# Altium PCB PCB.PcbDoc (part 3 of 4)
Units mm, origin at the board's own origin, x right, y up, seen from the top; angles counter-clockwise.
Board outline 86.25 x 140 mm, 4 copper layers (Top Layer, GND, PWR, Bottom Layer), stack 1.57 mm thick; 308 components, 255 nets, 1064 pads, 1223 vias.
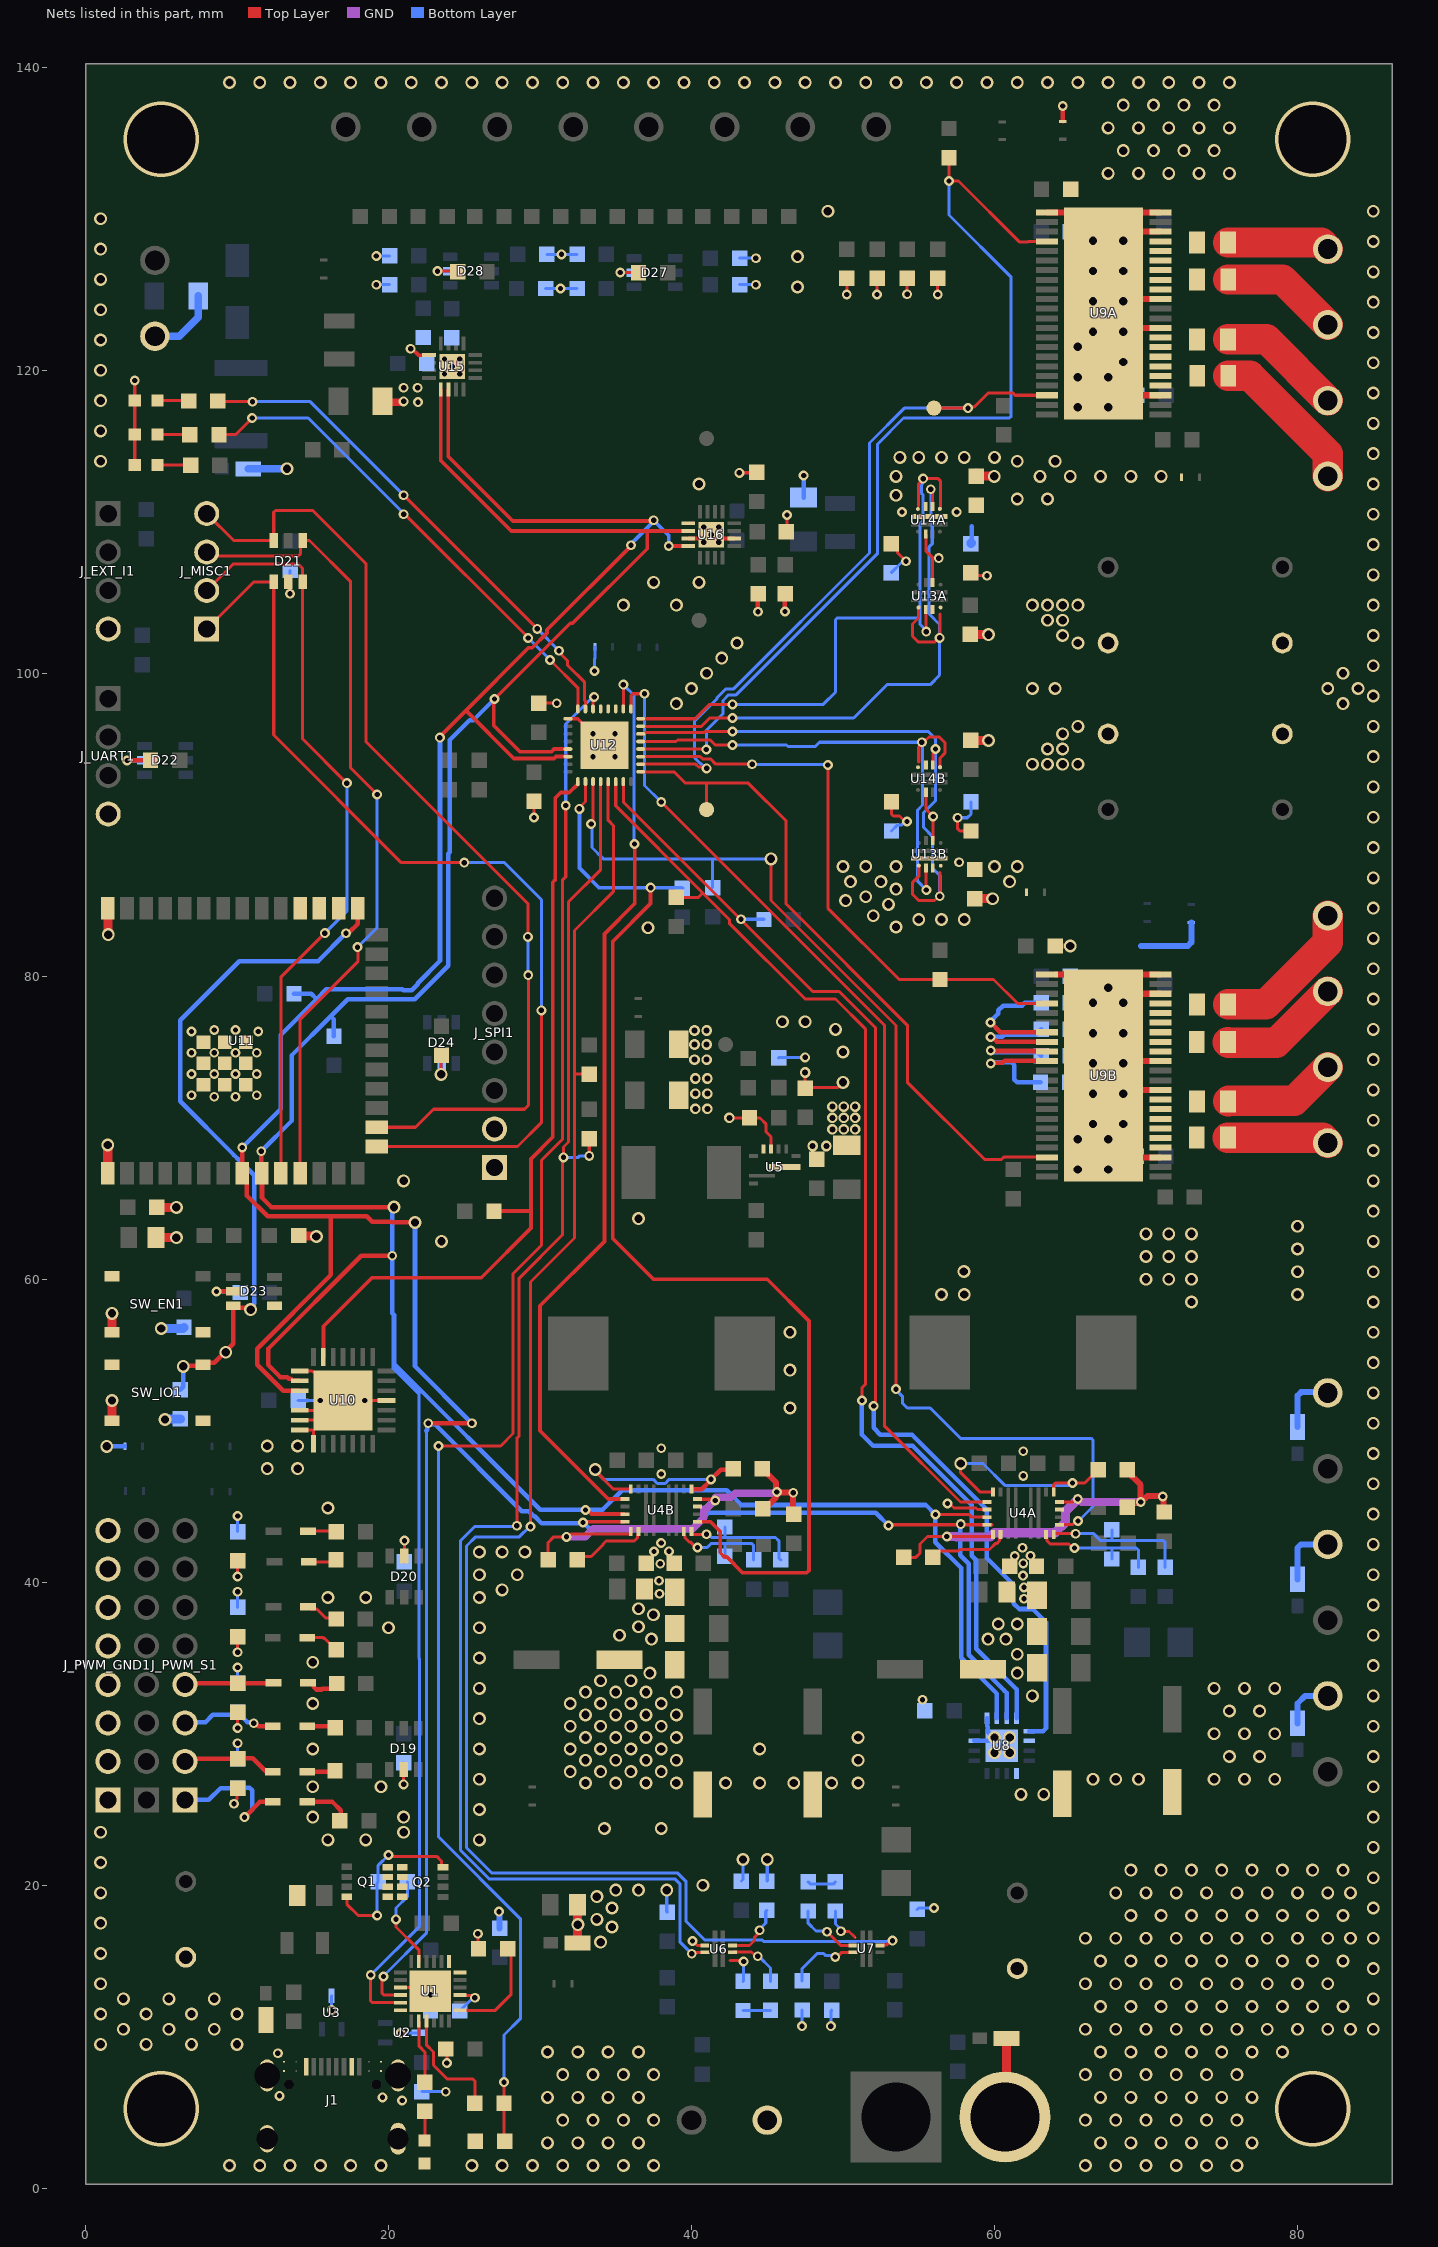
[diagram p5: the nets of this part, all layers, seen from the top]

## Via types
v1: diameter 0.85, hole 0.55, Top Layer to Bottom Layer, tented both sides, 772 vias
v2: diameter 0.65, hole 0.35, Top Layer to Bottom Layer, tented both sides, 362 vias
v3: diameter 0.65, hole 0.35, Top Layer to Bottom Layer, tented bottom, 26 vias
v4: diameter 0.7, hole 0.4, Top Layer to Bottom Layer, tented both sides, 25 vias
v5: diameter 0.65, hole 0.35, Top Layer to Bottom Layer, tented top, 19 vias
v6: diameter 0.85, hole 0.55, Top Layer to Bottom Layer, tented bottom, 14 vias
v7: diameter 5, hole 4.5, Top Layer to Bottom Layer, 4 vias
v8: diameter 0.8, hole 0.5, Top Layer to Bottom Layer, tented both sides, 1 vias

## Nets (pads, with @x,y where several pads share a name; then routed paths per layer and width w, separated by ;. In a path a pad name is that pad's centre, name@x,y a point inside that pad or via, vN(x,y) a via of type N, cw(c..) or ccw(c..) an arc to the next point about the centre after c; other vN are vias at no path point) (continued)
GND: C1.2 C2.1 C3.1 C4.1 C5.1 C8A.2 C8B.2 C9A.1 C9B.1 C10A.1 C10B.1 C12A.1 C12B.1 C13A.1 C13B.1 C14A.1 C14B.1 C15A.1 C15B.1 C16A.2 C16B.2 C17A.2 C17B.2 C18A.1 C18B.1 C21.1 C22.1 C23.1 C24.1 C25.2 C26.1 C27.1 C28.1 C29.1 C30.1 C31.1 C32A.2 C32B.2 C34A.2 C34B.2 C35A.1 C35B.1 C36A.2 C36B.2 C38A.1 C38B.1 C39.1 C40.1 C41.1 C42.2 C43.1 C44.1 C45.1 C46.1 C47.1 C48.1 C49.1 C50.1 C51.1 C52.1 C53.1 C54A.1 C54B.1 C55A.1 C55B.1 C56A.2 C56B.2 C57A.1 C57B.1 C58A.1 C58B.1 C59.1 C60.1 C61.1 C62.1 C63.1 C64.1 C65.1 C66.1 C67.1 C68.1 C69.1 C*1A.1 C*1B.1 C*2A.1 C*2B.1 C*3.1 D1.A D2.A D3.K D4.K D6.A D7.A D8.A D9.A D10.A D19.2 D20.2 D21.2 D22.2 D23.2 D24.2 D25.K D26.K D27.2 D28.2 J1.17 J1.18 J1.19 J1.20 J1.A1 J1.A12 J1.B1 J1.B12 J_1.2 J_EXT_1.2 J_EXT_2.2 J_EXT_I1.4 J_PWM_GND1.1 J_PWM_GND1.2 J_PWM_GND1.3 J_PWM_GND1.4 J_PWM_GND1.5 J_PWM_GND1.6 J_PWM_GND1.7 J_PWM_GND1.8 J_SPI1.1 J_SPI1.2 J_SUP1.2 J_UART1.4 J_VREG1.2 J_VREG2.2 JP2A.1 JP2B.1 JP4.2 PWM_3.1 R3.1 R6.1 R11.1 R13.1 R15.1 R18.1 R21.1 R23.1 R24A.1 R24B.1 R25A.1 R25B.1 R26A.1 R26B.1 R27A.1 R27B.1 R38.1 R39.1 R40.1 R41.1 R42.1 R43.1 R44.1 R45.1 R55A.2 R55B.2 R56A.2 R56B.2 R62.2 R63.2 R64.2 R65.2 R66.2 R67.2 R68.2 R69.2 R*2A.1 R*2B.1 R_CC2.1 RCC1.1 SW_EN1.2 SW_IO1.2 U1.3 U1.25 U2.3 U3.3 U4A.2 U4A.5 U4A.9 U4A.17 U4B.5 U4B.9 U4B.17 U5.3 U5.9 U6.2 U6.8 U7.8 U8.3 U8.5 U8.17 U9A.3 U9A.10 U9A.13 U9A.20 U9A.22 U9A.23 U9A.45 U9B.3 U9B.10 U9B.13 U9B.20 U9B.22 U9B.23 U9B.45 U10.1 U10.11 U10.22 U10.26 U10.27 U10.28 U10.29 U11.1 U11.40 U11.41_1 U11.41_2 U11.41_3 U11.41_4 U11.41_5 U11.41_6 U11.41_7 U11.41_8 U11.41_9 U12.25 U12.33 U13A.8 U13B.8 U14A.8 U14B.8 U15.9 U15.17 U16.7 U16.14 U16.17 | length 324
  Top Layer w0.2: D4.K@3.25,113.75 D25.K@3.25,115.75 D26.K@3.25,118 v2(3.25,119.322) ; v2(9.8,25.385) 9.8,25.506 10,25.706 10,26.378 R44.1@10.04,26.418 ; v2(10.04,30.38) R42.1@10.04,31.418 ; v2(10.04,35.38) R40.1@10.04,36.418 ; v2(10.04,40.38) R38.1@10.04,41.418 ; D21.2@13.375,106.038 13.437,105.975 13.437,105.313 v2(13.5,105.25) ; U10.28@14.133,50.05 15.031,50.05 15.05,50.031 U10.1@15.05,49.133 ; U10.27@14.133,50.7 15.7,50.7 16.35,51.35 U10.26@14.133,51.35 ; U10.22@14.133,53.95 14.95,53.95 15.025,53.875 15.144,53.875 17,52.019 U10.29@17,52 v2(18.433,52) U10.11@19.867,52 ; U1.3@20.785,13.25 22.5,13.25 U1.25@22.75,13 ; v2(21,26.663) D19.2@21,27.638 ; D20.2@21.04,41.742 21.046,41.748 21.046,42.745 v2(21.052,42.751) ; v5(23.238,126.546) 24.529,126.546 C64.1@24.575,126.5 ; v1(23.475,73.525) 23.475,74.766 C50.1@23.496,74.788 ; v5(23.7,120.75) v5(24.2,120.25) ; C4.1@23.782,9.196 23.851,9.127 v2(23.851,8.269) ; v2(25.9,16.8) 25.9,15.838 R3.1@25.938,15.8 ; v2(29.6,90.475) C53.1@29.6,91.55 ; C52.1@29.926,98.024 v2(31.101,98.024) ; R*2B.1@30.538,41.5 30.538,42.633 30.905,43 v2(31.75,43) 31.872,43 32.072,43.2 35.98,43.2 36,43.22 U4B.5@36,43.35 ; U12.25@31.85,97 32.5,97 v2(33.5,96) U12.33@34.25,95.25 ; v5(35.3,126.45) C63.1@36.5,126.45 ; v2(40.06,16.325) 40.085,16.325 40.385,16.025 U6.2@40.9,16.025 ; U4B.17@40.4,45.5 40.42,45.48 41.485,45.48 v2(41.565,45.4) ; v4(42.5,70.65) R11.1@43.825,70.65 43.827,70.648 44.516,70.648 44.932,70.232 44.932,69.718 44.964,69.686 45.25,69.4 U5.3@45.25,68.6 ; U6.8@42.7,15.575 42.725,15.6 43.964,15.6 44.252,15.312 v2(44.374,15.312) ; C68.1@44.371,105.212 C68.1@44.396,105.238 ; C69.1@46.19,105.231 C69.1@46.196,105.238 ; C66.1@46.262,109.346 46.3,109.384 v2(46.3,110.45) ; R13.1@47.5,72.612 R13.1@47.5,72.9 ; v4(47.5,73.65) R13.1@47.5,72.9 ; v2(48.942,16.934) 49.85,16.025 U7.8@50.65,16.025 ; v1(50,73) 49.65,72.65 47.75,72.65 R13.1@47.5,72.9 ; v2(50.25,125) R24A.1@50.25,126.075 ; v2(52.25,125) R25A.1@52.25,126.075 ; R55A.2@53.19,108.562 53.598,108.154 53.598,107.957 v2(54.16,107.396) ; R55B.2@53.2,91.512 53.2,90.704 53.323,90.582 53.729,90.582 54.098,90.213 v2(54.22,90.213) ; R*2A.1@54,41.65 54.808,41.65 55.077,41.919 55.077,42.527 55.573,43.023 56.852,43.023 v2(56.853,43.024) ; v2(54.234,125.016) 54.234,126.059 R26A.1@54.25,126.075 ; U14A.8@55.465,109.2 55.465,108.075 55.915,107.625 ; U14B.8@55.475,92.15 55.475,91.025 55.925,90.575 U13B.8@55.925,88.95 ; U13A.8@55.915,106 55.915,107.575 55.94,107.6 v2(56.315,107.6) ; v2(56.25,125) R27A.1@56.25,126.075 ; v2@56.855,43.024 59.88,43.024 59.9,43.044 U4A.5@59.9,43.15 ; v2(56.9,45.198) 57.022,45.198 57.32,44.9 58.773,44.9 58.873,44.8 U4A.2@59.5,44.8 ; v2(57.568,90.464) 57.568,89.732 57.712,89.588 R56B.2@58.45,89.588 ; R56A.2@58.44,106.638 58.637,106.441 v2(59.502,106.441) ; U4A.17@64.3,45.3 65.178,45.3 65.378,45.5 v2(65.5,45.5) ; C38A.1@65.025,131.95 C38A.1@65.075,132
  Top Layer w0.25: v2(21.462,121.423) 21.56,121.423 21.982,121 U15.9@22.679,121 ; U16.7@39.779,108.9 40.56,108.9 40.8,108.66 v2(40.8,108.65) ; U16.17@41.8,108.66 42.04,108.9 U16.14@42.821,108.9 ; v2(43.159,113.23) 44.272,113.23 C67.1@44.304,113.262
  Top Layer w0.3: v2(2.75,94.25) 2.754,94.254 C48.1@4.288,94.254 ; v2(8.65,59.2) D23.2@9.75,59.2 ; C68.1@44.371,105.212 44.387,105.195 v2(44.387,104.062) ; v2(46.166,104.074) 46.166,105.207 C69.1@46.19,105.231 ; U9B.23@63.45,80.118 63.95,80.118 U9B.23@64,80.168 ; C38B.1@64,82 v1(65,82) ; JP2A.1@64.5,136.425 v2(64.5,137.45)
  Top Layer w0.4: C18B.1@44.675,47.5 45.587,46.587 45.587,46.005 v2(45.635,45.957) ; C*1B.1@44.693,44.865 44.762,44.796 45.587,45.621 45.587,45.909 v2(45.635,45.957) ; C*2B.1@46.75,44.5 46.713,44.537 v2(46.713,45.912) 46.691,45.934 45.658,45.934 v2(45.635,45.957) ; U9A.23@63.45,130.418 64.8,130.418 U9A.45@67.2,128.018 ; U9B.23@63.95,80.118 64.775,80.118 U9B.45@66.5,78.393 ; U9B.45@66.084,75.834 U9B.45@67.084,74.834 ; U9B.45@67.2,73.25 67.2,70.25 67.375,70.075 67.375,69.375 v1(67.5,69.25) ; U9A.45@67.2,121.55 67.2,120.753 69.6,118.353 U9A.3@70.95,118.353 ; U9A.45@67.2,123.75 U9A.45@67.2,126.748 ; U9B.45@67.385,74.135 67.385,75.135 67.5,75.25 U9B.45@68.5,75.25 ; U9B.45@67.385,75.403 U9B.45@67.385,78.403 ; U9B.45@67.5,78.25 69.368,80.118 U9B.22@70.95,80.118 ; U9B.45@68.5,71.25 U9B.45@68.4,71.35 ; U9A.45@68.5,122.798 U9A.10@70.95,122.798 ; U9A.45@68.5,124.703 U9A.13@70.95,124.703 ; C*1A.1@68.762,44.946 69.068,45.252 69.602,45.252 v2(69.65,45.3) ; C18A.1@68.762,47.435 68.701,47.374 69.65,46.425 v2(69.65,45.3) ; U9B.3@70.95,68.053 69.6,68.053 68.4,69.253 U9B.45@68.4,71.35 ; U9B.10@70.95,72.498 69.6,72.498 69.6,74.403 U9B.13@70.95,74.403 ; U9B.20@70.95,78.848 69.098,78.848 v1(68.5,78.25) v1(68.5,76.25) U9B.45@68.5,75.25 ; U9A.20@70.95,129.148 69.6,129.148 U9A.45@67.2,126.748 ; U9A.22@70.95,130.418 69.6,130.418 U9A.45@67.2,128.018 ; C*2A.1@71.204,44.637 71.157,44.684 71.157,45.612 v2(71.11,45.659) 71.081,45.688 70.086,45.688 69.698,45.3 v2(69.65,45.3) ; U9A.45@67.2,126.748 U9A.45@67.2,128.018 ; U9B.45@67.5,73.15 U9B.45@68.4,72.25 ; U9B.45@67.5,73.15 67.5,72.25 U9B.45@68.4,72.25 ; U9B.45@67.5,73.15 U9B.45@67.2,73.45 67.2,73.95 67.625,74.375 67.75,74.375 68.5,75.125 U9B.45@68.5,75.25 ; U9B.45@68.4,71.35 U9B.45@68.4,72.25
  Top Layer w0.5: C59.1@19.6,117.95 19.645,117.905 20.955,117.905 v2(21,117.95)
  Top Layer w0.6: U11.1@1.465,67 v1(1.465,68.862) ; U11.40@1.465,84.5 1.483,84.483 1.483,82.768 v1(1.5,82.75) ; SW_IO1.2@1.75,50.65 v1(1.75,52) ; SW_EN1.2@1.75,56.5 v1(1.75,57.75) ; C45.1@4.65,62.75 v1(6,62.75) ; C46.1@4.712,64.746 v1(5.996,64.746) ; C47.1@14.063,62.89 14.094,62.858 15.207,62.858 v1(15.239,62.827) ; D1.A@32.469,16.205 32.475,16.212 C2.1@32.475,18.718 ; C54A.1@58.411,102.571 58.421,102.56 59.59,102.56 v1(59.6,102.55) ; C57B.1@58.425,95.575 v1@59.594,95.575 ; C54B.1@58.7,85.125 v1@59.869,85.125 ; C57A.1@58.804,113.212 59.004,113.012 v1@59.972,113.012 ; J_EXT_1.2@60.7,4.7 60.797,4.797 D7.A@60.797,9.9
  GND w0.5: v2(31.75,43) 32.993,43 33.514,43.521 40.071,43.521 40.804,44.254 40.804,44.813 40.937,44.813 41.524,45.4 v2(41.565,45.4) ; v2@41.565,45.574 41.593,45.602 42.607,45.602 42.89,45.884 45.457,45.884 45.5,45.928 45.607,45.928 v2(45.635,45.957) ; v2(65.5,45.5) 65.541,45.5 65.741,45.3 v2(69.65,45.3)
  GND w0.6: v2@56.876,43.015 57.472,43.015 57.489,42.998 59.718,42.998 59.987,43.267 63.987,43.267 64.689,43.968 64.689,44.675 65.5,45.486 v2(65.5,45.5)
  Bottom Layer w0.2: R45.1@10.04,28.342 v2(10.04,29.38) ; R43.1@10.04,33.342 v2(10.04,34.38) ; R41.1@10.04,38.342 v2(10.04,39.38) ; R39.1@10.04,43.342 v2(10.04,44.38) ; v2(13.5,105.25) 13.5,106.784 C44.1@13.504,106.788 ; C39.1@14.03,52.004 14.034,52 v2(15.5,52) ; U3.3@16.25,12.7 16.252,12.698 16.252,11.76 v2(16.254,11.758) ; v5(19.2,125.65) R65.2@20.075,125.65 ; v5(19.2,127.55) R64.2@20.075,127.55 ; v2(20.8,10.24) 20.813,10.253 21.983,10.253 U2.3@21.995,10.265 ; v2(21,26.663) C40.1@21,28.075 ; C41.1@21.036,41.342 21.052,41.358 v2(21.052,42.751) ; R_CC2.1@22.2,6.375 v2(23.775,6.375) ; C5.1@22.775,11.7 22.769,11.707 v2(22.769,12.768) 22.769,13.744 C3.1@22.8,13.775 ; v5(23.238,126.546) v5(23.238,126.546) 24.073,126.548 D28.2@24.075,126.55 ; v1(23.475,73.525) 23.488,73.538 23.488,74.238 D24.2@23.5,74.25 ; R62.2@30.375,125.4 v5(31.35,125.4) R69.2@32.45,125.4 ; R63.2@30.45,127.65 v5(31.425,127.65) R68.2@32.45,127.65 ; v2(33.6,100.15) 33.6,100.966 33.625,100.991 JP4.2@33.625,101.75 ; v5(35.3,126.45) D27.2@36.2,126.45 ; v1(38.366,19.677) 38.366,18.258 R15.1@38.4,18.225 ; R66.2@43.175,125.65 v5(44.25,125.65) ; R67.2@43.175,127.4 v5(44.25,127.4) ; C26.1@43.294,20.278 43.4,20.384 v1(43.4,21.7) ; v2(44.374,15.312) 44.447,15.312 45.215,14.544 C27.1@45.215,13.664 ; R18.1@44.973,20.274 45,20.3 v1(45,21.7) ; C*3.1@45.746,74.612 45.784,74.65 v2(47.5,74.65) ; v2(47.3,10.7) R23.1@47.3,11.765 ; C29.1@47.7,18.3 47.7,17.492 48.217,16.975 48.9,16.975 v2(48.942,16.934) ; v2(49.2,10.7) 49.2,11.7 C28.1@49.25,11.75 ; C58A.1@53.194,106.638 53.866,107.31 54.073,107.31 v2(54.16,107.396) ; C58B.1@53.204,89.588 53.612,89.996 53.881,89.996 54.098,90.213 v2(54.22,90.213) ; R21.1@54.899,18.408 54.991,18.5 v2(56,18.5) ; v2(57.568,90.464) 58.21,90.464 58.45,90.704 C55B.1@58.45,91.512
  Bottom Layer w0.3: v1(1.4,48.975) PWM_3.1@2.6,48.975 ; v2(2.75,94.25) D22.2@3.888,94.25 ; v2(8.65,59.2) 10.15,59.2 C49.1@10.22,59.129 ; C65.1@47.4,111.6 v2(47.4,113.05) ; C55A.1@58.465,108.588 58.5,108.622 58.5,109.7 ; U8.3@58.654,29.529 U8.17@60.154,29.529 ; U8.5@59.504,31.029 59.507,31.027 59.507,30.502 59.549,30.459 59.549,30.134 U8.17@60.154,29.529 ; v1(61,29.75) 60.479,29.229 U8.17@60.479,29.204 U8.17@60.154,29.529
  Bottom Layer w0.4: RCC1.1@27.335,17.162 v2@27.335,18.26 ; 69.662,82 72.766,82 73,82.234 JP2B.1@73,83.55 ; D9.A@80,30.697 80,32 80.5,32.5 J_SUP1.2@82,32.5 ; D10.A@80,40.197 80,42.266 80.234,42.5 J_VREG2.2@82,42.5 ; D8.A@80,50.25 80,52.319 80.234,52.553 J_VREG1.2@82,52.553
  Bottom Layer w0.5: J_1.2@4,122.25 J_1.2@4.581,122.25 6.2,122.25 7.439,123.489 C30.1@7.439,124.906 ; D6.A@10.75,113.5 v1(13.303,113.5)
  Bottom Layer w0.6: v1(5,56.75) 6.425,56.75 C51.1@6.5,56.825 ; v1(5.25,50.75) 5.269,50.769 6.235,50.769 C43.1@6.254,50.788 ; C55A.1@58.44,108.562 C55A.1@58.465,108.588
  other v1: 9.5,1.5 11.5,1.5 13.5,1.5 15.5,1.5 17.5,1.5 19.5,1.5 25.5,1.5 27.5,1.5 29.5,1.5 31.5,1.5 33.5,1.5 35.5,1.5 37.5,1.5 66,1.5 68,1.5 70,1.5 72,1.5 74,1.5 76,1.5 30.5,3 32.5,3 34.5,3 36.5,3 67,3 69,3 71,3 73,3 75,3 77,3 31.5,4.5 33.5,4.5 35.5,4.5 37.5,4.5 66,4.5 68,4.5 70,4.5 72,4.5 74,4.5 76,4.5 30.5,6 32.5,6 34.5,6 36.5,6 67,6 69,6 71,6 73,6 75,6 77,6 31.5,7.5 33.5,7.5 35.5,7.5 37.5,7.5 66,7.5 68,7.5 70,7.5 72,7.5 74,7.5 76,7.5 30.5,9 32.5,9 34.5,9 36.5,9 67,9 69,9 71,9 73,9 75,9 77,9 79,9 1,9.5 4,9.5 7,9.5 10,9.5 2.5,10.5 5.5,10.5 8.5,10.5 66,10.5 68,10.5 70,10.5 72,10.5 74,10.5 76,10.5 78,10.5 80,10.5 82,10.5 83.5,10.5 85,10.5 1,11.5 4,11.5 7,11.5 10,11.5 67,12 69,12 71,12 73,12 75,12 77,12 79,12 81,12 83,12 2.5,12.5 5.5,12.5 8.5,12.5 85,12.5 1,13.5 66,13.5 68,13.5 70,13.5 72,13.5 74,13.5 76,13.5 78,13.5 80,13.5 82,13.5 85,14.5 67,15 69,15 71,15 73,15 75,15 77,15 79,15 81,15 83,15 1,15.5 34,16.25 66,16.5 68,16.5 70,16.5 72,16.5 74,16.5 76,16.5 78,16.5 80,16.5 82,16.5 83.5,16.5 85,16.5 34.75,17.25 32.5,17.4 1,17.5 33.75,17.75 69,18 71,18 73,18 75,18 77,18 79,18 81,18 83,18 34.75,18.5 85,18.5 33.75,19.25 1,19.5 68,19.5 70,19.5 72,19.5 74,19.5 76,19.5 78,19.5 80,19.5 82,19.5 83.5,19.5 35,19.677 36.5,19.677 40.75,20 85,20.5 69,21 71,21 73,21 75,21 77,21 79,21 81,21 83,21 1,21.5 85,22.5 16,23 18.5,23 26,23 1,23.5 21,23.5 34.25,23.75 38,23.75 15,24.5 21,24.5 85,24.5 26,25 61.75,26 63.25,26 15,26.5 19.5,26.5 85,26.5 33,26.75 35,26.75 37,26.75 39,26.75 42.25,26.75 44.5,26.75 46.75,26.75 49.25,26.75 51,26.75 26,27 66.5,27 68,27 69.5,27 74.5,27 76.5,27 78.5,27 32,27.5 34,27.5 36,27.5 38,27.5 33,28.25 35,28.25 37,28.25 39,28.25 51,28.25 75.5,28.5 77.5,28.5 85,28.5 60,28.75 61,28.75 15,29 26,29 32,29 34,29 36,29 38,29 44.5,29 33,29.75 35,29.75 37,29.75 39,29.75 51,29.75 60,29.75 74.5,30 76.5,30 78.5,30 32,30.5 34,30.5 36,30.5 38,30.5 85,30.5 26,31 33,31.25 35,31.25 37,31.25 39,31.25 75.5,31.5 77.5,31.5 15,32 32,32 34,32 36,32 38,32 62.5,32.5 85,32.5 33,32.75 35,32.75 37,32.75 39,32.75 26,33 74.5,33 76.5,33 78.5,33 34,33.5 36,33.5 37.25,34 61.5,34 85,34.5 14.998,34.719 26,35 61.5,35.25 37.354,36.247 59.575,36.25 60.75,36.25 35.25,36.5 85,36.5 20,37 26,37 36.499,37.068 60.25,37.25 61.5,37.25 37.48,37.854 36.5,38.25 85,38.5 16,39 18.5,39 26,39 27.5,39.5 26,40.5 28.5,40.5 85,40.5 26,42 27.5,42 29,42 85,42.5 85,44.5 16,44.9 85,46.5 12,47.5 14,47.5 85,48.5 12,49 14,49 85,50.5 46.5,51.5 85,52.5 46.5,54 85,54.5 46.5,56.5 85,56.5 73,58.5 85,58.5 56.5,59 58,59 80,59 70,60 71.5,60 73,60 80,60.5 85,60.5 57.975,60.516 70,61.5 71.5,61.5 73,61.5 80,62 23.5,62.5 85,62.5 70,63 71.5,63 73,63 80,63.5 36.5,64 85,64.5 21,66.5 85,66.5 65.5,67.25 67.5,67.25 85,68.5 65.5,69.25 66.5,70.25 68.5,70.25 85,70.5 66.5,72.25 68.5,72.25 85,72.5 66.5,74.25 68.5,74.25 85,74.5 50,75 66.5,76.25 49.5,76.5 85,76.5 46,77 47.5,77 66.5,78.25 85,78.5 67.5,79.25 85,80.5 85,82.5 37.125,83.2 85,84.5 59.879,85.115 85,86.5 85,88.5 85,90.5 85,92.5 62.5,94 63.5,94 64.5,94 65.5,94 85,94.5 63.5,95 64.5,95 59.604,95.565 64.5,96 65.5,96.5 85,96.5 39,98 83,98 85,98.5 40,99 62.5,99 64,99 82,99 84,99 41,100 83,100 85,100.5 42,101 43,102 65.5,102 64.5,102.5 85,102.5 63.5,103.5 64.5,103.5 35.5,104.5 39,104.5 62.5,104.5 63.5,104.5 64.5,104.5 65.5,104.5 85,104.5 37.5,106 40.5,106 85,106.5 85,108.5 85,110.5 40.5,112.5 85,112.5 59.983,113.002 1,114 85,114.5 1,116 85,116.5 65.5,117.55 67.5,117.55 1,118 85,118.5 65.5,119.55 67.5,119.55 1,120 85,120.5 68.5,120.55 65.5,121.55 1,122 85,122.5 66.5,122.55 68.5,122.55 1,124 85,124.5 66.5,124.55 68.5,124.55 47,125.5 1,126 85,126.5 66.5,126.55 68.5,126.55 47,127.5 1,128 85,128.5 66.5,128.55 68.5,128.55 1,130 49,130.5 85,130.5 67.5,133 69.5,133 71.5,133 73.5,133 75.5,133 68.5,134.5 70.5,134.5 72.5,134.5 74.5,134.5 67.5,136 69.5,136 71.5,136 73.5,136 75.5,136 68.5,137.5 70.5,137.5 72.5,137.5 74.5,137.5 9.5,139 11.5,139 13.5,139 15.5,139 17.5,139 19.5,139 21.5,139 23.5,139 25.5,139 27.5,139 29.5,139 31.5,139 33.5,139 35.5,139 37.5,139 39.5,139 41.5,139 43.5,139 45.5,139 47.5,139 49.5,139 51.5,139 53.5,139 55.5,139 57.5,139 59.5,139 61.5,139 63.5,139 65.5,139 67.5,139 69.5,139 71.5,139 73.5,139 75.5,139
  other v2: 20.9,5.8 19.6,6 12.8,6.1 12.697,8.916 27.299,18.26 55.25,32.25 61.95,38.912 37.89,39.245 61.95,39.663 37.856,40.099 61.886,40.441 37.935,41.228 61.9,41.25 61.335,41.734 62.377,41.75 37.528,42.03 38.516,42.039 61.842,42.281 37.995,42.589 61.899,47.025 38,47.15 61.899,48.65 38,48.85 8.5,72.05 9.9,72.05 7,72.15 11.3,72.15 7,73.55 8.5,73.55 9.9,73.55 11.3,73.55 7,74.95 8.5,74.95 9.9,74.95 11.3,74.95 7,76.35 11.4,76.35 8.5,76.45 9.9,76.45 55.95,90.55 33.5,94.5 34.948,94.5 34.948,96 41.8,108.65 41.3,109.15 40.8,109.65 41.8,109.65 21.95,117.9 21,118.85 21.925,118.85
  other v4: 48,68.8 48.9,68.8 49.3,69.9 50.05,69.9 50.8,69.9 49.3,70.65 50.05,70.65 50.8,70.65 40.25,71.25 41.05,71.25 49.3,71.4 50.05,71.4 50.8,71.4 40.25,72.25 41.05,72.25 40.25,73.25 41.05,73.25 40.2,74.5 41,74.5 40.2,75.5 41,75.5 40.2,76.423 41,76.423
  other v5: 23.7,119.75 24.7,119.75 24.7,120.75
  other v7: 5,5.25 81,5.25 5,135.25 81,135.25
GPIO3: D21.1 J_MISC1.1 U11.15 | length 64.2
  Top Layer w0.2: J_MISC1.1@8,102.92 11.118,106.038 D21.1@12.425,106.038 12.425,95.925 20.85,87.5 v2(25,87.5) ; U11.15@19.225,68.765 28.515,68.765 30.089,70.339 v2(30.089,77.75)
  Bottom Layer w0.2: v2(25,87.5) 27.65,87.5 30.1,85.05 30.1,77.761 v2(30.089,77.75)
GPIO17: D21.3 J_MISC1.2 U11.10 | length 50.1
  Top Layer w0.2: J_MISC1.2@8,105.46 9.74,107.2 14.05,107.2 14.325,106.925 D21.3@14.325,106.038 14.325,95.675 v2(17.25,92.75) ; U11.10@12.895,67 12.895,79.945 v2(15.8,82.85)
  Bottom Layer w0.2: v2(15.8,82.85) 17.25,84.3 v2(17.25,92.75)
GPIO18: D21.4 J_MISC1.3 U11.11 | length 53.5
  Top Layer w0.2: J_MISC1.3@8,108 8.25,107.75 14.064,107.75 14.181,107.867 14.181,108.411 14.325,108.555 D21.4@14.325,108.762 14.788,108.762 17.5,106.05 17.5,93.75 v2(19.25,92) ; U11.11@14.165,67 14.165,77.165 18,81 18,81.875 v2(17.95,81.925)
  Bottom Layer w0.2: v2(17.95,81.925) 19.25,83.225 v2(19.25,92)
GPIO46: D21.6 J_MISC1.4 U11.16 | length 65.4
  Top Layer w0.2: J_MISC1.4@8.002,110.538 9.778,108.762 D21.6@12.425,108.762 12.425,110.633 12.542,110.75 15,110.75 18.505,107.245 18.505,95.495 29.2,84.8 v2(29.2,82.6) ; U11.16@19.225,70.035 21.785,70.035 22.973,71.223 28.973,71.223 29.239,71.489 29.239,80.061 v2(29.225,80.075)
  Bottom Layer w0.2: v2(29.2,82.6) 29.213,82.587 29.213,80.088 v2(29.225,80.075)
IFB: C5.2 U1.15 | length 2.4
  Top Layer w0.2: U1.15@24.715,12.75 24.743,12.723 25.431,12.723 25.578,12.575 v2(25.7,12.575)
  Bottom Layer w0.2: C5.2@24.7,11.7 25.489,12.489 25.614,12.489 v2(25.7,12.575)
INT: R5.2 U1.9 | length 7.7
  Top Layer w0.2: U1.9@22.5,11.035 22.5,9.466 22.974,8.991 22.974,8.126 23.9,7.2 25.583,7.2 25.7,7.083 R5.2@25.7,5.6
INT_3V: R5.1 R6.2 U12.22 | length 105.6
  Top Layer w0.2: v2(23.3,49) 27.4,49 28.223,49.823 28.223,60.373 30.1,62.25 30.1,67.85 31.475,69.225 31.475,86.339 31.7,86.564 v2(31.7,91.275) ; v3(27.625,7.005) R5.1@27.625,5.6 27.625,3.138 R6.2@27.662,3.1 ; U12.22@33.5,97.65 33.508,97.658 33.508,98.374 v2(33.573,98.439)
  Bottom Layer w0.2: v2(23.3,49) 23.3,23.2 28.7,17.8 28.7,11.191 27.625,10.116 v3(27.625,7.005) ; v2(31.7,91.275) 31.7,96.65 33.489,98.439 v2(33.573,98.439)
INT_VCCA: C18A.2 U4A.18 U4A.21 | length 15.2
  Top Layer w0.2: v6(57.769,47.842) 57.765,47.839 57.765,47.235 59.05,45.95 U4A.21@59.9,45.95 ; U4A.18@63.897,45.953 63.897,46.433 64.014,46.55 v2(65.15,46.55) 65.952,46.55 66.141,46.739 C18A.2@66.838,47.435
  Bottom Layer w0.2: v6(57.769,47.842) 59.241,47.842 60.684,46.4 64.878,46.4 65.028,46.55 v2(65.15,46.55)
INT_VCCB: C18B.2 U4B.18 U4B.21 | length 14.5
  Top Layer w0.2: v6(33.644,47.441) 33.644,47.356 34.85,46.15 U4B.21@36,46.15
  Top Layer w0.3: U4B.18@40,46.15 40.68,46.15 41.284,46.754 v2(41.284,46.793) 41.928,47.437 42.687,47.437 C18B.2@42.75,47.5
  Bottom Layer w0.2: v6(33.644,47.441) 33.644,47.356 34.207,46.793 37.473,46.793 37.741,46.525 38.259,46.525 38.527,46.793 v2(41.284,46.793)
INTERNAL_I2C_SCL: R46.1 U1.5 U4A.3 U4B.3 U8.6 U10.23 U11.9 U12.29 U15.13 U16.6 | length 231.4
  Top Layer w0.2: v2(18.825,14.075) 18.825,12.367 18.942,12.25 U1.5@20.785,12.25 ; v2(56.1,44.475) 56.113,44.462 56.126,44.475 58.325,44.475 58.5,44.3 U4A.3@59.5,44.3
  Top Layer w0.25: U15.13@23.45,118.729 23.45,114.05 28.1,109.4 37.075,109.4 ; U12.29@31.675,94.995 30.92,94.995 30.75,94.825 28.675,94.825 26.95,96.55 26.95,98.25 32.001,103.301 32.151,103.301 37.075,108.225 37.075,109.4 ; v2(33,44.777) 33.122,44.777 33.399,44.5 U4B.3@35.6,44.5 ; U16.6@39.779,109.4 37.075,109.4
  Top Layer w0.3: v2(11.6,68.45) 11.6,67.025 U11.9@11.625,67 11.85,66.775 11.55,66.475 11.575,66.475 11.65,66.4 11.65,65.375 12.275,64.75 20.35,64.75 v6@20.375,64.775 ; U10.23@14.133,53.3 14.13,53.303 13.702,53.303 13.558,53.447 13.407,53.447 13.309,53.546 12.854,53.546 12.05,54.35 12.05,55.4 18.2,61.55 v2(20.25,61.55)
  Bottom Layer w0.2: v2(18.825,14.075) 22.054,17.304 22.054,34.936 22,34.99 22,52.5
  Bottom Layer w0.3: v2(11.6,68.45) 13.6,70.45 13.6,74.776 16.187,77.363 ; R46.1@16.4,76.05 16.4,77.15 16.187,77.363 ; v6(20.363,64.763) 20.257,64.657 20.257,64.466 20.25,64.459 v2(20.25,61.55) 20.25,57.765 20.363,57.653 20.363,54.438 ; 22,52.5 20.363,54.137 20.363,54.438 ; v2(27,98.3) 25.614,96.914 25.364,96.914 24.046,95.596 24.046,88.196 23.95,88.1 23.95,80.7 21.725,78.475 17.299,78.475 16.187,77.363 ; U8.6@60.154,31.029 60.154,32.654 57.8,35.009 57.8,40.943 56.1,42.643 v2(56.1,44.475) 55.475,45.1 43.3,45.1 42.325,46.075 35.425,46.075 34.127,44.777 v2(33,44.777) 30.023,44.777 20.363,54.438
INTERNAL_I2C_SDA: R47.1 U1.4 U4A.4 U4B.4 U8.7 U10.24 U11.8 U12.30 U15.14 U16.8 | length 235.1
  Top Layer w0.2: v2(19.67,13.981) 19.584,13.895 19.584,12.867 19.701,12.75 U1.4@20.785,12.75
  Top Layer w0.25: v2(23.389,95.753) 23.389,95.828 25.104,97.543 ; U15.14@23.95,118.729 23.95,117.199 23.948,117.197 23.948,114.302 28.2,110.05 37.45,110.05 v2(37.5,110.1) ; U12.30@31.85,94.5 31.062,94.5 30.937,94.375 28.272,94.375 25.104,97.543 ; v2(32.839,43.942) 32.897,44 U4B.4@35.6,44 ; v2(36,108.45) 36,108.403 30.467,102.87 30.467,102.664 29.485,101.682 29.243,101.682 25.104,97.543 ; v2@38.5,108.4 U16.8@39.779,108.4 ; v2@53.045,43.795 57.744,43.795 59.5,43.795 U4A.4@59.795,43.795
  Top Layer w0.3: v2(10.35,68.7) 10.35,67.005 10.655,66.7 10.655,65.521 12.026,64.15 16.2,64.15 ; U10.24@14.133,52.65 13.043,52.65 11.325,54.368 11.325,55.425 16.2,60.3 16.2,64.15 ; v6(21.75,63.75) 20.236,63.75 20.187,63.799 18.927,63.799 18.576,64.15 16.2,64.15 ; v2(22.625,50.5) v2(25.5,50.5)
  Bottom Layer w0.2: v2(19.67,13.981) 19.67,14.01 22.5,16.84 22.5,50
  Bottom Layer w0.25: v2(36,108.45) 36,108.525 37.5,110.025 v2(37.5,110.1) 38.5,109.1 v2(38.5,108.4)
  Bottom Layer w0.3: v2(10.35,68.7) 12.9,71.25 12.9,76.15 15.25,78.5 ; R47.1@13.762,78.85 14.9,78.85 15.25,78.5 ; v6(21.75,63.75) 21.75,54.25 v2(25.5,50.5) ; 22.5,50 22.558,50.058 22.558,50.433 v2(22.625,50.5) ; v2@22.606,50.506 22.665,50.446 23.054,50.446 28.8,44.7 29.251,44.7 29.603,44.348 29.655,44.348 30.101,43.902 32.799,43.902 v2(32.839,43.942) ; v2(23.389,95.753) 23.4,95.742 23.4,81.025 21.925,79.55 21.925,79.47 21.53,79.075 20.97,79.075 20.897,79.148 15.898,79.148 15.25,78.5 ; v2@32.902,43.902 33.379,43.425 39.925,43.425 41.1,44.6 52.15,44.6 v2(53,43.75) ; v2@57.744,43.812 57.75,43.807 57.75,41.774 58.3,41.224 58.3,35.216 60.654,32.861 60.654,32.846 60.804,32.696 U8.7@60.804,31.029
  other v2: 57.769,43.837
IO0: C43.2 D23.3 SW_IO1.3 U11.27 | length 45.9
  Top Layer w0.3: v1(6.45,54.25) 6.5,54.3 7.7,54.3 7.9,54.5 8.5,54.5 9.75,55.75 D23.3@9.75,58.25 9.879,58.121 10.63,58.121 10.751,58 v1(10.9,58) ; v2(17.188,82.838) 17.255,82.905 17.413,82.905 17.983,83.476 17.983,84.492 U11.27@17.975,84.5
  Bottom Layer w0.3: C43.2@6.254,52.712 6.45,52.909 v1(6.45,54.25) ; v1(10.9,58) 10.9,58.149 11.131,58.38 11.131,66.869 10.152,67.848 10.151,67.848 9.798,68.201 9.798,68.202 6.25,71.75 6.25,77.1 10.15,81 15.35,81 v2(17.188,82.838)
  other v6: 9.26,55.184
IPROPI1B: R27B.2 U9B.32 | length 8.2
  Top Layer w0.3: v2(59.75,74.25) 59.788,74.288 60.525,74.288 60.675,74.438 63.415,74.438 U9B.32@63.45,74.403
  Bottom Layer w0.3: v2(59.75,74.25) 59.817,74.317 61.14,74.317 61.315,74.141 61.315,73.176 61.491,73 R27B.2@63.038,73
IPROPI2B: R26B.2 U9B.31 | length 6.9
  Top Layer w0.3: v2(59.75,75.1) 59.781,75.069 63.419,75.069 U9B.31@63.45,75.038
  Bottom Layer w0.3: v2@60,75 62.825,75 R26B.2@63.075,74.75
IPROPI3B: R25B.2 U9B.30 | length 7.4
  Top Layer w0.3: v2(59.745,75.995) 59.84,75.995 60.163,75.673 U9B.30@63.45,75.673
  Bottom Layer w0.3: v2(59.745,75.995) 60.524,75.995 60.67,76.142 62.717,76.142 R25B.2@63.075,76.5
IPROPI4B: R24B.2 U9B.29 | length 8
  Top Layer w0.3: v2(59.742,76.953) 60.388,76.308 U9B.29@63.45,76.308
  Bottom Layer w0.3: v2(59.742,76.953) 59.742,77.03 60.252,77.54 60.252,77.752 60.567,78.067 61.817,78.067 62,78.25 R24B.2@63.075,78.25
L1: D25.A R51.1 | length 2
  Top Layer w0.2: D25.A@4.75,115.75 R51.1@6.788,115.75
L2: D26.A R52.1 | length 2.1
  Top Layer w0.2: D26.A@4.75,118 6.788,118 R52.1@6.813,117.975
L3V5OK: D4.A R12.1 | length 2
  Top Layer w0.2: D4.A@4.75,113.75 R12.1@6.75,113.75
L_USB_OK: D3.A R4.1 | length 1.9
  Top Layer w0.2: D3.A@22.385,3.143 22.4,3.157 R4.1@22.4,5.075
LED: R4.2 U1.8 | length 4.2
  Top Layer w0.2: U1.8@22,11.035 22,9.4 22.4,9 R4.2@22.4,7
MOS_G: Q1.4 Q2.4 R2.2 | length 11.2
  Top Layer w0.2: Q1.4@17.25,19.25 17.25,18.75 18,18 v3(19.25,18) ; v2(20,22) 20.086,21.914 23.175,21.914 23.496,21.593 23.496,21.304 Q2.4@23.6,21.2
  Bottom Layer w0.2: v3(19.25,18) 19.25,20.154 R2.2@19.321,20.225 19.321,21.321 v2(20,22)
MuxInAB: C54B.2 JP7.2 U13B.5
  other v1: 53.5,83.25 55,83.75 56.5,83.75 58,83.75 52,84 53,84.75 50.173,84.996 51.5,85.25 53.5,85.75 50.5,86.25 52.5,86.25 61,86.25 50,87.25 51.5,87.25 53.5,87.25 60,87.25 61.5,87.25
  other v2: 57.666,87.531
MuxInBA: C57A.2 JP6.2 U14A.5
  other v1: 61.5,111.5 63.5,111.5 53.5,111.75 53.5,113 63,113 65,113 67,113 69,113 71,113 61.5,114 64,114 53.75,114.25 55,114.25 56.5,114.25 58,114.25 60,114.25
  other v2: 53.9,110.65 57.5,110.65
NetC11A_1: C11A.1 R9A.2 U4A.13 | length 10
  Top Layer w0.2: U4A.13@63.92,43.161 63.92,43.206 v2(65.354,43.206)
  Bottom Layer w0.2: v2(65.354,43.206) 66.544,43.206 67,42.75 71.149,42.75 71.266,42.633 R9A.2@71.266,40.987 ; C11A.1@67.746,43.462 67.746,42.754 67.75,42.75
NetC11A_2: C11A.2 R8A.2 U4A.12 | length 8.6
  Top Layer w0.2: U4A.12@63.4,43.15 63.42,43.13 63.42,42.893 63.48,42.833 63.48,42.726 63.666,42.54 64.881,42.54 65.153,42.268 v2(65.275,42.268)
  Bottom Layer w0.2: v2(65.275,42.268) 67.75,42.268 ; C11A.2@67.746,41.538 67.75,41.541 67.75,42.268 ; R8A.2@69.494,40.986 69.494,42.133 69.359,42.268 67.75,42.268
NetC11B_1: C11B.1 R9B.2 U4B.13 | length 8.1
  Top Layer w0.2: U4B.13@40,43.35 40,43.17 40.003,43.167 v2(40.996,43.167)
  Bottom Layer w0.2: v2(40.996,43.167) 41.118,43.167 41.335,42.95 42.2,42.95 ; C11B.1@42.2,43.65 42.2,42.95 ; R9B.2@45.9,41.475 45.767,41.608 45.767,42.733 45.55,42.95 42.2,42.95
NetC11B_2: C11B.2 R8B.2 U4B.12 | length 7.2
  Top Layer w0.2: U4B.12@39.5,43.35 39.52,43.33 39.52,43.093 39.58,43.033 39.58,42.926 39.837,42.669 39.911,42.669 40.278,42.302 v2(40.4,42.302)
  Bottom Layer w0.2: v2(40.4,42.302) 41.037,42.302 41.285,42.55 42.2,42.55 ; C11B.2@42.2,41.725 42.2,42.55 ; R8B.2@44.1,41.475 44.1,42.433 43.983,42.55 42.2,42.55
NetC27_2: C27.2 R17.1 | length 1.8
  Bottom Layer w0.2: R17.1@43.4,11.738 45.213,11.738 C27.2@45.215,11.739
NetC29_2: C29.2 R22.1 | length 1.9
  Bottom Layer w0.2: C29.2@47.7,20.225 47.85,20.075 49.35,20.075 R22.1@49.5,20.225
NetD11_A: D11.A R30.2 | length 1.9
  Top Layer w0.2: D11.A@14.678,43.38 16.516,43.38 R30.2@16.555,43.342
NetD12_A: D12.A R31.2 | length 1.9
  Top Layer w0.2: D12.A@14.738,41.35 16.388,41.35 R31.2@16.538,41.5
NetD13_A: D13.A R32.2 | length 2.2
  Top Layer w0.2: D13.A@14.678,38.38 14.828,38.23 15.27,38.23 15.853,37.647 16.471,37.647 R32.2@16.544,37.573
NetD14_A: D14.A R33.2 | length 2.2
  Top Layer w0.2: D14.A@14.638,36.35 15.681,36.35 15.724,36.307 15.774,36.307 R33.2@16.54,35.54
NetD15_A: D15.A R34.2 | length 2.4
  Top Layer w0.3: D15.A@14.678,33.38 14.953,33.38 15.053,33.28 15.053,33.099 15.229,32.923 15.583,32.923 15.623,32.964 16.223,32.964 R34.2@16.581,33.322
NetD16_A: D16.A R35.2 | length 1.9
  Top Layer w0.3: D16.A@14.638,30.5 16.386,30.5 R35.2@16.479,30.407
NetD17_A: D17.A R36.2 | length 1.8
  Top Layer w0.3: D17.A@14.638,27.5 16.418,27.5 R36.2@16.466,27.548
NetD18_A: D18.A R37.2 | length 3.2
  Top Layer w0.3: D18.A@14.638,25.5 16.3,25.5 16.842,24.958 16.842,24.304 R37.2@16.788,24.25
NetD23_4: D23.4
NetJ1_A8: J1.A8
NetJ1_B8: J1.B8
NetR2_1: R2.1 U1.23 | length 6.2
  Top Layer w0.2: v3(20.5,17.75) 20.5,17.25 22,15.75 U1.23@22,14.965
  Bottom Layer w0.2: v3(20.5,17.75) 20.5,18.5 21.246,19.246 R2.1@21.246,20.225
NetR17_2: R17.2 U6.7 | length 2.3
  Top Layer w0.2: U6.7@42.55,15.05 43.367,15.05 v2(43.442,14.975)
  Bottom Layer w0.2: R17.2@43.4,13.662 43.442,13.704 v2(43.442,14.975)
NetR18_2: R18.2 U6.9 | length 3.9
  Top Layer w0.2: U6.9@42.7,16.025 42.703,16.028 43.828,16.028 44.15,16.35 44.15,16.556 44.499,16.905 v3(44.499,17.027)
  Bottom Layer w0.2: v3(44.499,17.027) 44.499,17.109 44.9,17.51 44.9,18.276 R18.2@44.973,18.349
NetR22_2: R22.2 U7.7 | length 2.6
  Top Layer w0.2: v3(49.86,16.969) 49.879,16.95 50.4,16.95 50.79,16.56 U7.7@50.796,16.56
  Bottom Layer w0.2: R22.2@49.5,18.3 49.5,17.45 49.86,17.091 v3(49.86,16.969)
NetR23_2: R23.2 U7.9 | length 4.8
  Top Layer w0.2: v3(49.493,15.272) 49.614,15.272 49.917,15.575 U7.9@50.65,15.575
  Bottom Layer w0.2: R23.2@47.3,13.69 47.3,14.498 48.299,15.497 48.723,15.497 48.868,15.352 49.413,15.352 v3(49.493,15.272)
NetR*2A_2: R*2A.2 U4A.6 | length 5.3
  Top Layer w0.2: R*2A.2@55.925,41.65 56.333,42.058 57.578,42.058 57.683,42.163 59.663,42.163 60.05,42.55 60.144,42.55 60.32,42.726 60.32,42.82 60.38,42.88 60.38,43.13 U4A.6@60.4,43.15
NetR*2B_2: R*2B.2 U4B.6 | length 5
  Top Layer w0.2: R*2B.2@32.462,41.5 32.658,41.696 33.378,41.696 34.152,42.469 34.152,42.516 34.357,42.721 36.215,42.721 36.42,42.926 36.42,43.09 36.5,43.17 U4B.6@36.5,43.35
NetSW_EN1_1: SW_EN1.1
NetSW_EN1_4: SW_EN1.4
NetSW_IO1_1: SW_IO1.1
NetSW_IO1_4: SW_IO1.4
NetU1_6: U1.6
NetU1_18: U1.18
NetU1_19: U1.19
NetU4A_16: U4A.16
NetU4B_16: U4B.16
NetU5_4: U5.4
NetU8_10: U8.10
NetU8_13: U8.13
NetU11_28: U11.28
NetU11_29: U11.29
NetU11_30: U11.30
NetU13A_3: U13A.3
NetU13B_3: U13B.3
NetU14A_3: U14A.3
NetU14B_3: U14B.3
NetU16_5: U16.5
NMOS: Q1.5 Q1.6 Q1.7 Q1.8 Q2.5 Q2.6 Q2.7 Q2.8
OTP: R3.2 U1.13 | length 6.9
  Top Layer w0.2: U1.13@24.715,11.75 27.05,11.75 28.1,12.8 28.1,15.562 R3.2@27.862,15.8
OUT1_PROTA: FB1A.2 OUT_A1A.1 | length 10.2
  Top Layer w2: FB1A.2@75.431,119.64 76.86,119.64 82,114.5 OUT_A1A.1@82,113
OUT1_PROTB: FB1B.2 OUT_A1B.1 | length 6.7
  Top Layer w2: FB1B.2@75.4,69.35 76.441,69.35 76.449,69.342 ; 76.457,69.334 81.666,69.334 OUT_A1B.1@82,69
OUT1A: FB1A.1 U9A.4 U9A.5 U9A.6
OUT1B: FB1B.1 U9B.4 U9B.5 U9B.6
OUT2_PROTA: FB2A.2 OUT_A1A.2 | length 8.3
  Top Layer w2: FB2A.2@75.415,122.041 77.959,122.041 OUT_A1A.2@82,118
OUT2_PROTB: FB2B.2 OUT_A1B.2 | length 7.5
  Top Layer w2: FB2B.2@75.425,71.75 75.459,71.784 79.784,71.784 OUT_A1B.2@82,74
OUT2A: FB2A.1 U9A.7 U9A.8 U9A.9
OUT2B: FB2B.1 U9B.7 U9B.8 U9B.9
OUT3_PROTA: FB3A.2 OUT_B1A.2 | length 6.8
  Top Layer w2: FB3A.2@75.415,128.441 81.559,128.441 OUT_B1A.2@82,128
OUT3_PROTB: FB3B.2 OUT_B1B.2 | length 10
  Top Layer w2: FB3B.2@75.425,78.15 77.92,78.15 82,82.23 OUT_B1B.2@82,84
OUT3A: FB3A.1 U9A.17 U9A.18 U9A.19
OUT3B: FB3B.1 U9B.17 U9B.18 U9B.19
OUT4_PROTA: FB4A.2 OUT_B1A.1 | length 7.8
  Top Layer w2: FB4A.2@75.428,125.994 76.814,125.994 76.819,125.999 79.001,125.999 OUT_B1A.1@82,123
OUT4_PROTB: FB4B.2 OUT_B1B.1 | length 8
  Top Layer w2: FB4B.2@75.4,75.65 75.443,75.607 78.607,75.607 OUT_B1B.1@82,79
OUT4A: FB4A.1 U9A.14 U9A.15 U9A.16
OUT4B: FB4B.1 U9B.14 U9B.15 U9B.16
P0: R29.1 U10.20 U12.1 | length 51.9
  Top Layer w0.25: U10.20@15.7,54.867 15.7,56.9 18.9,60.1 26.124,60.1 29.4,63.376 29.4,64.06 29.4,64.5 ; R29.1@26.962,64.5 29.4,64.5 ; U12.1@32.5,92.85 32.5,92.694 31.931,92.125 31.375,92.125 31,91.75 31,86.361 30.847,86.208 30.847,69.397 29.4,67.95 29.4,64.5
P1: R7B.1 U4B.14 U12.2 | length 78.7
  Top Layer w0.2: v2(32.6,91.05) 32.6,91.134 33,91.534 U12.2@33,92.85
  Top Layer w0.25: v2(37.3,85.85) 37.3,84.8 34.8,82.3 34.8,62.7 37.5,60 45,60 47.75,57.25 47.75,40.773 47.604,40.627 43.373,40.627 42.333,41.667 42.183,41.667 41.9,41.95 41.9,43.35 41.25,44 U4B.14@40.4,44
  Bottom Layer w0.25: v2(32.6,91.05) 32.6,87.15 33.9,85.85 v2(37.3,85.85) 39.362,85.85 R7B.1@39.4,85.812
P2: R7A.1 U4A.14 U12.3 | length 78.6
  Top Layer w0.2: v2(33.375,90.05) 33.375,90.172 33.5,90.297 U12.3@33.5,92.85 ; v6(45.25,87.75) 45.25,85 53.5,76.75 v2(53.5,52.75) ; U4A.14@64.3,43.8 65.151,43.8 65.392,44.041 v2(65.514,44.041)
  Bottom Layer w0.2: v2(33.375,90.05) 33.427,89.998 33.427,88.504 34.181,87.75 41.4,87.75 ; R7A.1@41.4,85.85 41.4,87.75 ; v6(45.25,87.75) 41.4,87.75 ; v2(53.5,52.75) 53.5,52.702 53.918,52.284 53.918,51.832 54.25,51.5 55.75,51.5 57.75,49.5 66.383,49.5 66.5,49.383 66.5,45 65.541,44.041 v2(65.514,44.041)
P3: R16.1 U6.3 U12.4 | length 100.1
  Top Layer w0.2: v2(28.473,43.727) 28.473,49.508 28.623,49.658 28.623,60.073 31.5,62.95 31.5,67.995 v2(31.552,68.047) ; v2@31.527,68.072 31.552,68.097 31.552,68.736 31.875,69.059 31.875,84.915 34,87.04 U12.4@34,92.85 ; v2(33.25,68.147) R16.1@33.25,69.288 ; v2(40.019,15.476) 40.141,15.476 40.24,15.575 U6.3@40.9,15.575
  Bottom Layer w0.2: v2(28.473,43.727) 28.422,43.675 25.675,43.675 24.75,42.75 24.75,22.316 26.664,20.402 38.933,20.402 39.227,20.108 39.227,16.269 v2(40.019,15.476) ; v2(31.552,68.047) 32.525,68.047 32.625,68.147 v2(33.25,68.147)
P4: R20.1 U7.3 U12.5 | length 110.4
  Top Layer w0.2: v2(29.375,43.673) 29.375,59.825 32.275,62.725 32.275,73.538 ; R20.1@33.25,73.538 32.275,73.538 ; U12.5@34.5,92.85 34.5,90.291 34.838,89.953 34.838,85.588 32.275,83.025 32.275,73.538 ; U7.3@52.45,16.025 52.625,16.025 52.65,16.05 52.852,16.05 53.151,16.348 v2(53.272,16.348)
  Bottom Layer w0.2: v2(29.375,43.673) 29.304,43.673 28.631,43 25.75,43 25.15,42.4 25.15,22.481 26.83,20.802 39.098,20.802 39.627,20.273 39.627,17.642 40.892,16.377 43.921,16.377 43.946,16.402 44.654,16.402 44.758,16.297 53.221,16.297 v2(53.272,16.348)
P5: R76.1 U8.8 U12.6 | length 77.5
  Top Layer w0.2: U12.6@35,92.85 35,91.25 40.75,85.5 ; R76.1@39,85.212 40.462,85.212 40.75,85.5 ; v2(51.25,52) 51.25,52.842 51.5,53.092 51.5,76.5 49.5,78.5 47.5,78.5 42.5,83.5 42.5,83.75 40.75,85.5
  Bottom Layer w0.3: v2(51.25,52) 51.25,49.75 52,49 54.6,49 58.5,45.1 58.5,41.75 58.8,41.45 58.8,35.604 61.454,32.95 61.454,32.614 U8.8@61.454,31.029
P6: R75.2 U8.9 U12.7 | length 79.6
  Top Layer w0.2: U12.7@35.5,92.85 35.5,91.5 43.235,83.765 v2(43.265,83.765) ; v2@43.25,83.75 48,79 49.75,79 52.156,76.594 52.156,51.983 52.106,51.933 52.106,51.727 v2(52.02,51.641)
  Bottom Layer w0.2: v2(43.265,83.765) 44.772,83.765 R75.2@44.788,83.75
  Bottom Layer w0.3: v2(52.02,51.641) 52.02,50.2 52.47,49.75 54.557,49.75 59.5,44.807 59.5,41.6 61.275,39.825 61.275,38.589 61.628,38.237 62.513,38.237 63.4,37.35 63.4,30.355 63.224,30.179 U8.9@62.304,30.179
P10: TP5.1 U9B.42 U12.9 | length 44.6
  Top Layer w0.2: U12.9@36.65,93.5 38.85,93.5 39.6,92.75 43.75,92.75 46.25,90.25 46.25,84.768 54.25,76.768 54.25,73 59.35,67.9 60.46,67.9 60.618,68.058 63.445,68.058 U9B.42@63.45,68.053 ; 40.987,92.723 41,92.709 TP5.1@41,91
P11: TP4.1 U9A.42 U12.10 | length 46.8
  Top Layer w0.2: U12.10@36.65,94 40.275,94 40.464,93.811 40.914,93.811 v3(41,93.725) ; TP4.1@56,117.5 v2(58.25,117.5) 58.322,117.572 58.662,117.572 59.6,118.511 61.196,118.511 61.354,118.353 U9A.42@63.45,118.353
  Bottom Layer w0.2: v3(41,93.725) 40.903,93.725 40.2,94.428 40.2,96.834 41.675,98.309 41.675,98.375 42.275,98.975 42.784,98.975 51.75,107.941 51.75,115.2 54.05,117.5 v2(58.25,117.5)
P12: R28B.2 U9B.26 U12.11 | length 39.1
  Top Layer w0.2: U12.11@36.65,94.5 40.57,94.5 40.72,94.35 41.259,94.35 41.609,94 v3(44,94) ; v2(49,93.95) 49,84.5 53.712,79.788 R28B.2@56.4,79.788 59.937,79.788 61.512,78.213 U9B.26@63.45,78.213
  Bottom Layer w0.2: v3(44,94) 44.025,93.975 48.975,93.975 v2(49,93.95)
P13: R28A.2 U9A.26 U12.12 | length 66
  Top Layer w0.2: U12.12@36.65,95 36.658,95.008 40.946,95.008 v3(40.979,94.975) ; R28A.2@57,134.038 v2(57,132.5) 57.001,132.499 57.625,132.499 61.641,128.483 62.206,128.483 62.236,128.513 U9A.26@63.45,128.513
  Bottom Layer w0.2: v3(40.979,94.975) 40.979,96.229 42.075,97.325 42.075,98.209 42.441,98.575 42.95,98.575 52.29,107.915 52.29,115.14 54,116.85 60.983,116.85 61.1,116.967 61.1,126.15 57,130.25 v2(57,132.5)
P14: U12.13 U13B.2 U14B.1 U14B.4 | length 35.3
  Top Layer w0.2: U12.13@36.65,95.5 38.972,95.5 39.072,95.6 41.238,95.6 41.565,95.273 v3(42.7,95.273) ; 55,94.129 55,95.121 55.679,95.8 56.36,95.8 56.725,95.435 56.725,94.725 56.4,94.4 U14B.1@56.4,93.83 ; U13B.2@55.475,87.15 55.488,87.137 55.488,85.713 v2(55.5,85.7)
  Bottom Layer w0.2: v3(42.7,95.273) 46.277,95.273 46.377,95.173 48.177,95.173 48.452,95.448 v2(55.205,95.448) ; v2@55.253,95.401 55.253,91.302 54.925,90.975 54.925,86.275 v2(55.5,85.7)
P15: U12.14 U13B.1 U13B.4 U14B.2 | length 37.7
  Top Layer w0.2: U12.14@36.65,96 36.841,96 36.921,96.08 40.801,96.08 40.878,96.157 v3(42.703,96.157) ; U13B.1@55,87.3 55,86.6 54.6,86.2 54.6,85.4 55,85 56.044,85 56.33,85.286 v2(56.386,85.286) 56.386,85.528 56.4,85.542 56.4,86.85 ; U14B.2@55.925,93.95 55.925,94.703 56.1,94.878 v2(56.1,95)
  Bottom Layer w0.2: v3(42.703,96.157) 55.626,96.157 56.1,95.683 56.1,91.584 55.325,90.809 55.325,89.825 55.9,89.25 55.9,87.15 56.386,86.664 v2(56.386,85.286)
P16: U12.15 U13A.1 U13A.4 U14A.2 | length 40.9
  Top Layer w0.2: U12.15@36.507,96.5 40.655,96.5 41.205,97.05 v3(42.7,97.05) ; U13A.1@54.99,104.35 54.99,103.65 54.59,103.25 54.59,102.45 54.99,102.05 56.034,102.05 56.32,102.336 v2(56.376,102.336) 56.376,102.578 56.39,102.592 56.39,103.9 ; v2(55.796,112.15) 55.796,112.028 55.915,111.909 U14A.2@55.915,111
  Bottom Layer w0.2: v3(42.7,97.05) 50.7,97.05 52.9,99.25 55.75,99.25 56.376,99.876 v2(56.376,102.336) 56.376,103.226 55.69,103.912 55.69,108.346 55.89,108.546 55.89,110.197 55.796,110.291 v2(55.796,112.15)
P17: U12.16 U13A.2 U14A.1 U14A.4 | length 41.2
  Top Layer w0.2: U12.16@36.483,97 40.25,97 41.2,97.95 v3(42.7,97.95) ; 54.992,111.038 54.992,112.508 55.165,112.681 55.165,112.792 55.107,112.85 56.279,112.85 56.421,112.708 56.421,110.931 56.403,110.913 56.403,110.863 U14A.1@56.39,110.85 ; U13A.2@55.465,104.2 55.478,104.188 55.478,102.763 v2(55.49,102.75)
  Bottom Layer w0.2: v3(42.7,97.95) 48.7,97.95 49.5,98.75 49.5,103.533 49.617,103.65 55.086,103.65 ; v2(55.29,112.85) 55.209,112.769 55.209,112.447 55.171,112.409 55.171,111.891 55.29,111.772 55.29,110.079 55.086,109.876 55.086,103.65 ; v2(55.49,102.75) 55.49,102.827 55.086,103.23 55.086,103.65
P20: U4A.1 U12.17 | length 65.6
  Top Layer w0.2: U12.17@36,97.65 36,98.533 36.117,98.65 v2(36.9,98.65) ; v2(38,91.5) 52.75,76.75 52.75,50.3 57.75,45.3 U4A.1@59.5,45.3
  Bottom Layer w0.2: v2(36.9,98.65) 36.9,92.6 v2(38,91.5)
P21: U4B.1 U12.18 | length 61.2
  Top Layer w0.2: U12.18@35.5,97.65 35.5,99.25 v2(35.501,99.251)
  Top Layer w0.25: U4B.1@35.6,45.5 34.5,45.5 30,50 30,58.25 34.25,62.5 34.25,82.8 36.25,84.8 36.25,88.719 v2(36.235,88.735)
  Bottom Layer w0.2: v2(35.501,99.251) 36.198,98.554 36.198,88.771 v2(36.235,88.735)
P22: U12.19
P23: U12.20
P24: U12.21
P26: R52.2 U12.23 | length 33.9
  Top Layer w0.2: R52.2@8.737,117.975 8.787,117.925 v2(11.025,117.925) ; v2(21,111.75) v2(29.817,102.933) ; v2(31.259,101.49) 31.259,101.391 31.8,100.85 31.8,100.55 32.948,99.402 32.948,98.221 33,98.169 U12.23@33,97.65
  Bottom Layer w0.2: v2(11.025,117.925) 11.05,117.95 14.8,117.95 v2(21,111.75) ; v2(29.817,102.933) v2(31.259,101.49)
P27: R51.2 U12.24 | length 33.1
  Top Layer w0.2: R51.2@8.712,115.75 9.9,115.75 v2(11,116.85) ; v2(21,110.5) 21.075,110.5 29.216,102.359 v2(29.216,102.332) ; v2(30.663,100.884) 32.5,99.047 U12.24@32.5,97.65
  Bottom Layer w0.2: v2(11,116.85) 14.7,116.85 21,110.55 v2(21,110.5) ; v2(29.216,102.332) v2(30.663,100.884)
PWM_ETX_0: D18.K J_PWM_S1.1 R45.2 | length 9.1
  Top Layer w0.3: v2(10.5,24.5) 11.5,25.5 D18.K@12.362,25.5
  Bottom Layer w0.3: J_PWM_S1.1@6.562,25.635 8.135,25.635 8.918,26.418 R45.2@10.04,26.418 10.07,26.447 10.824,26.447 11,26.272 11,25 v2(10.5,24.5)
PWM_ETX_1: D17.K J_PWM_S1.2 R44.2 | length 6.3
  Top Layer w0.3: J_PWM_S1.2@6.54,28.22 6.662,28.342 R44.2@10.04,28.342 10.078,28.38 11.048,28.38 11.928,27.5 D17.K@12.362,27.5
PWM_ETX_2: D16.K J_PWM_S1.3 R43.2 | length 6.5
  Top Layer w0.3: v2(11.1,30.7) 11.195,30.7 11.397,30.498 12.36,30.498 D16.K@12.362,30.5
  Bottom Layer w0.3: J_PWM_S1.3@6.54,30.76 7.92,30.76 8.41,31.25 9.872,31.25 R43.2@10.04,31.418 10.691,30.767 11.033,30.767 v2(11.1,30.7)
PWM_ETX_3: D15.K J_PWM_S1.4 R42.2 | length 5.9
  Top Layer w0.3: J_PWM_S1.4@6.54,33.25 6.632,33.342 12.364,33.342 D15.K@12.402,33.38